# Altium PCB pcb big.PcbDoc (part 5 of 5)
Units mil, origin at the board's own origin, x right, y up, seen from the top; angles counter-clockwise.
Board outline 4068 x 10796 mil, 6 copper layers (TopLayer, MidLayer1, MidLayer2, MidLayer3, MidLayer4, BottomLayer); 521 components, 260 nets, 1284 pads, 1180 vias.
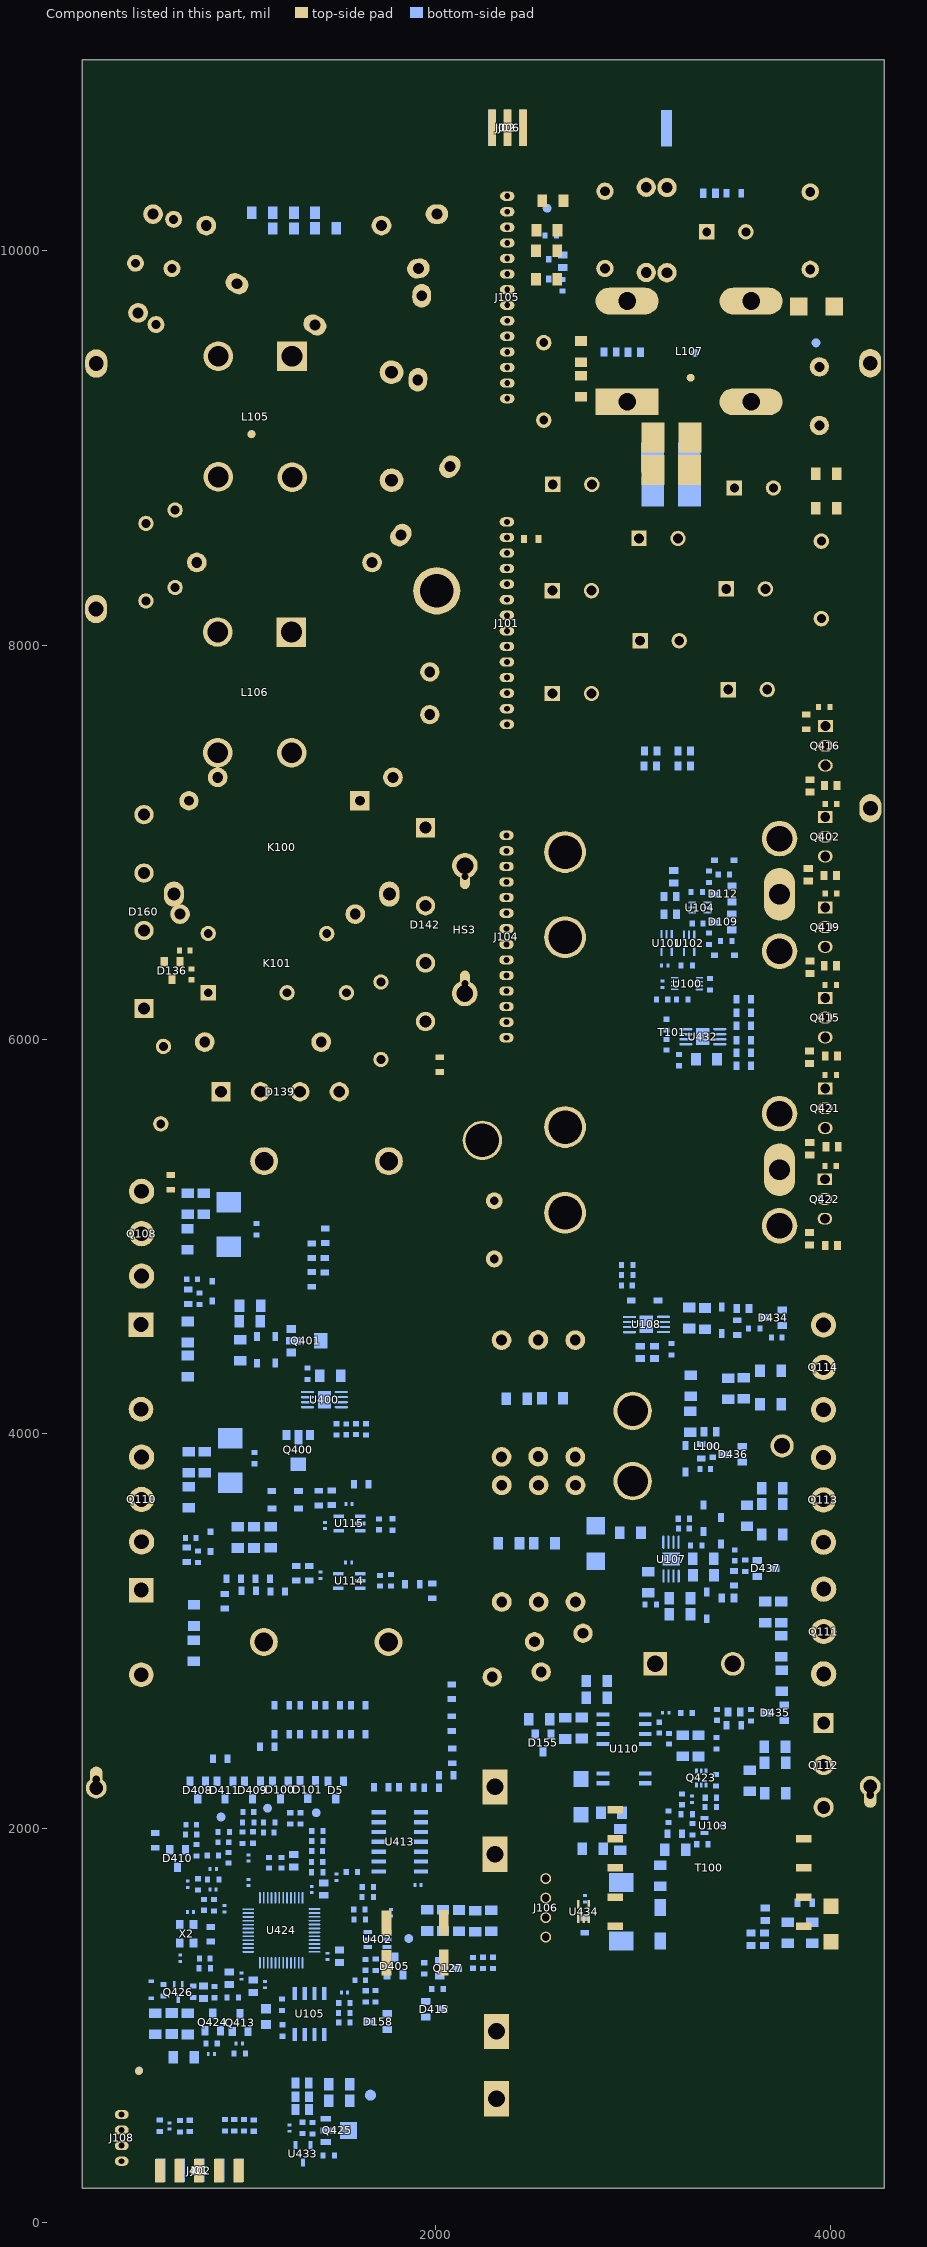
[diagram p9: the components of this part, seen from the top]

## Polygon pours and split planes (outlines as drawn) (continued)
UnNamedNet7 on MidLayer3 "MidLayer3-UnNamedNet7" (hatched 90Degree grid 5 track 6, remove dead copper, pour order 83): 76 vertices, not listed, extent 3923,4756 4170,7833
UnNamedNet37 on MidLayer3 "MidLayer3-UnNamedNet37" (hatched 90Degree grid 5 track 6, remove dead copper, pour order 84): 29 vertices, not listed, extent 3662,6535 4001,7533
UnNamedNet41 on MidLayer3 "MidLayer3-UnNamedNet41" (hatched 90Degree grid 5 track 6, remove dead copper, pour order 85): 30 vertices, not listed, extent 3660,5144 4001,6504
UnNamedNet50 on MidLayer3 "MidLayer3-UnNamedNet50" (hatched 90Degree grid 5 track 6, remove dead copper, pour order 86): 41 vertices, not listed, extent 1992,815 4014,4418
UnNamedNet4 on MidLayer3 "MidLayer3-UnNamedNet4" (hatched 90Degree grid 5 track 6, remove dead copper, pour order 87): 54 vertices, not listed, extent 2422,4772 4114,9332
UnNamedNet13 on MidLayer3 "MidLayer3-UnNamedNet13" (hatched 90Degree grid 5 track 6, remove dead copper, pour order 88): 3500,8899 3500,8876 3754,8876 3835,8957 3835,8974 3870,9009 3870,9306 3862,9314 3329,9314 3320,9305 3320,8883 3327,8876 3500,8876
UnNamedNet94 on MidLayer3 "MidLayer3-UnNamedNet94" (hatched 90Degree grid 5 track 6, remove dead copper, pour order 89): 17 vertices, not listed, extent 369,4311 1233,5447
UnNamedNet99 on MidLayer3 "MidLayer3-UnNamedNet99" (hatched 90Degree grid 5 track 6, remove dead copper, pour order 90): 21 vertices, not listed, extent 370,2808 1195,3763
UnNamedNet90 on MidLayer3 "MidLayer3-UnNamedNet90" (hatched 90Degree grid 5 track 6, remove dead copper, pour order 91): 31 vertices, not listed, extent 2068,3675 2872,6624
UnNamedNet270 on MidLayer3 "MidLayer3-UnNamedNet270" (hatched 90Degree grid 5 track 6, remove dead copper, pour order 92): 30 vertices, not listed, extent 1050,6168 2202,7695
UnNamedNet269 on MidLayer3 "MidLayer3-UnNamedNet269" (hatched 90Degree grid 5 track 6, remove dead copper, pour order 93): 21 vertices, not listed, extent 352,5900 974,7239
UnNamedNet11 on MidLayer3 "MidLayer3-UnNamedNet11" (hatched 90Degree grid 5 track 6, remove dead copper, pour order 94): 64 vertices, not listed, extent 238,245 2428,10901
UnNamedNet69 on MidLayer3 "MidLayer3-UnNamedNet69" (hatched 90Degree grid 5 track 6, remove dead copper, pour order 95): 1037,10448 1037,10423 1166,10423 1180,10437 1180,10881 993,10881 993,10438 1007,10424 1038,10424 1038,10445
UnNamedNet72 on MidLayer3 "MidLayer3-UnNamedNet72" (hatched 90Degree grid 5 track 6, remove dead copper, pour order 96): 21 vertices, not listed, extent 477,10095 886,10881
UnNamedNet277 on MidLayer3 "MidLayer3-UnNamedNet277" (hatched 90Degree grid 5 track 6, remove dead copper, pour order 97): 17 vertices, not listed, extent 1704,8169 2143,8909
UnNamedNet272 on MidLayer3 "MidLayer3-UnNamedNet272" (hatched 90Degree grid 5 track 6, remove dead copper, pour order 98): 21 vertices, not listed, extent 1178,7999 1723,8931
UnNamedNet273 on MidLayer3 "MidLayer3-UnNamedNet273" (hatched 90Degree grid 5 track 6, remove dead copper, pour order 99): 23 vertices, not listed, extent 648,7997 1112,8925
UnNamedNet61 on MidLayer3 "MidLayer3-UnNamedNet61" (hatched 90Degree grid 5 track 6, remove dead copper, pour order 100): 17 vertices, not listed, extent 2460,9613 3207,10044
UnNamedNet34 on MidLayer3 "MidLayer3-UnNamedNet34" (hatched 90Degree grid 5 track 6, remove dead copper, pour order 101): 36 vertices, not listed, extent 2281,10125 3214,10902
UnNamedNet254 on MidLayer3 "MidLayer3-UnNamedNet254" (hatched 90Degree grid 5 track 6, remove dead copper, pour order 102): 42 vertices, not listed, extent 3165,9361 3995,10900
UnNamedNet22 on MidLayer3 "MidLayer3-UnNamedNet22" (hatched 90Degree grid 5 track 6, remove dead copper, pour order 103): 20 vertices, not listed, extent 3403,9670 4070,10900
UnNamedNet11 on MidLayer3 "MidLayer3-UnNamedNet11 1" (hatched 90Degree grid 5 track 6, remove dead copper, pour order 104): 29 vertices, not listed, extent 3901,5859 4251,10344
UnNamedNet11 on MidLayer3 "MidLayer3-UnNamedNet11 2" (hatched 90Degree grid 5 track 6, remove dead copper, pour order 105): 30 vertices, not listed, extent 4113,1368 4265,5715
UnNamedNet17 on MidLayer3 "MidLayer3-UnNamedNet17" (hatched 90Degree grid 5 track 6, remove dead copper, pour order 106): 3832,1369 3832,1341 4050,1341 4050,1358 4019,1358 3857,1520 3595,1520 3579,1504 3579,1364 3600,1343 3832,1343
UnNamedNet8 on MidLayer3 "MidLayer3-UnNamedNet8" (hatched 90Degree grid 5 track 6, remove dead copper, pour order 107): 24 vertices, not listed, extent 3715,2019 4020,2866
UnNamedNet7 on MidLayer4 "MidLayer4-UnNamedNet7" (hatched 90Degree grid 5 track 6, remove dead copper, pour order 108): 21 vertices, not listed, extent 2419,4810 4179,9264
UnNamedNet285 on MidLayer4 "MidLayer4-UnNamedNet285" (hatched 90Degree grid 5 track 6, remove dead copper, pour order 109): 2817,6244 2879,6244 2879,6875 2669,7085 2513,7085 2476,7048 2476,6487 2442,6453 2442,6140 2513,6069 2513,5479 2557,5435 2812,5435 2877,5500 2877,6244
UnNamedNet13 on MidLayer4 "MidLayer4-UnNamedNet13" (hatched 90Degree grid 5 track 6, remove dead copper, pour order 110): 3612,8870 3612,8849 3829,8849 3848,8868 3848,9277 3811,9314 3443,9314 3368,9239 3368,8865 3383,8850 3612,8850
UnNamedNet34 on MidLayer4 "MidLayer4-UnNamedNet34" (hatched 90Degree grid 5 track 6, remove dead copper, pour order 111): 21 vertices, not listed, extent 2248,10151 3205,10895
UnNamedNet22 on MidLayer4 "MidLayer4-UnNamedNet22" (hatched 90Degree grid 5 track 6, remove dead copper, pour order 112): 35 vertices, not listed, extent 3158,9659 4069,10898
UnNamedNet61 on MidLayer4 "MidLayer4-UnNamedNet61" (hatched 90Degree grid 5 track 6, remove dead copper, pour order 113): 21 vertices, not listed, extent 2586,9614 3398,10135
UnNamedNet274 on MidLayer4 "MidLayer4-UnNamedNet274" (hatched 90Degree grid 5 track 6, remove dead copper, pour order 114): 30 vertices, not listed, extent 774,8504 2151,10370
UnNamedNet272 on MidLayer4 "MidLayer4-UnNamedNet272" (hatched 90Degree grid 5 track 6, remove dead copper, pour order 115): 26 vertices, not listed, extent 481,7999 1720,8930
UnNamedNet221 on MidLayer4 "MidLayer4-UnNamedNet221" (hatched 90Degree grid 5 track 6, remove dead copper, pour order 116): 36 vertices, not listed, extent 1186,6254 2218,7543
UnNamedNet147 on MidLayer4 "MidLayer4-UnNamedNet147" (hatched 90Degree grid 5 track 6, remove dead copper, pour order 117): 41 vertices, not listed, extent 2909,3413 3975,4868
UnNamedNet8 on MidLayer4 "MidLayer4-UnNamedNet8" (hatched 90Degree grid 5 track 6, remove dead copper, pour order 118): 153 vertices, not listed, extent 303,198 4023,7243
UnNamedNet69 on MidLayer4 "MidLayer4-UnNamedNet69" (hatched 90Degree grid 5 track 6, remove dead copper, pour order 119): 38 vertices, not listed, extent 423,9469 1768,10878
UnNamedNet11 on MidLayer4 "MidLayer4-UnNamedNet11" (hatched 90Degree grid 5 track 6, remove dead copper, pour order 120): 1422,10418 1422,10392 1529,10392 1540,10403 1531,10412 1531,10881 1511,10901 1318,10901 1309,10892 1309,10401 1319,10391 1422,10391
UnNamedNet72 on MidLayer4 "MidLayer4-UnNamedNet72" (hatched 90Degree grid 5 track 6, remove dead copper, pour order 121): 789,10437 789,10412 856,10412 856,10495 858,10515 861,10522 874,10535 879,10538 889,10543 889,10857 865,10881 655,10881 655,10412 790,10412 790,10437
UnNamedNet11 on MidLayer4 "MidLayer4-UnNamedNet11 1" (hatched 90Degree grid 5 track 6, remove dead copper, pour order 122): 59 vertices, not listed, extent 221,242 389,10328
UnNamedNet11 on MidLayer4 "MidLayer4-UnNamedNet11 2" (hatched 90Degree grid 5 track 6, remove dead copper, pour order 123): 34 vertices, not listed, extent 2494,5858 4251,10347
UnNamedNet11 on MidLayer4 "MidLayer4-UnNamedNet11 3" (hatched 90Degree grid 5 track 6, remove dead copper, pour order 124): 30 vertices, not listed, extent 4112,1354 4269,5715
UnNamedNet8 on BottomLayer "BottomLayer-UnNamedNet8" (hatched 90Degree grid 5 track 6, remove dead copper, pour order 125): 18 vertices, not listed, extent 2561,2541 2897,2773
UnNamedNet11 on BottomLayer "BottomLayer-UnNamedNet11" (hatched 90Degree grid 5 track 6, remove dead copper, pour order 126): 79 vertices, not listed, extent 229,692 696,10329
UnNamedNet11 on BottomLayer "BottomLayer-UnNamedNet11 1" (hatched 90Degree grid 5 track 6, remove dead copper, pour order 127): 129 vertices, not listed, extent 4053,1340 4268,10324
UnNamedNet7 on BottomLayer "BottomLayer-UnNamedNet7" (hatched 90Degree grid 5 track 6, remove dead copper, pour order 128): 43 vertices, not listed, extent 2417,6904 4149,9090
UnNamedNet41 on BottomLayer "BottomLayer-UnNamedNet41" (hatched 90Degree grid 5 track 6, remove dead copper, pour order 129): 3943,6104 3943,6085 3995,6085 3995,6133 3913,6133 3913,6085 3945,6085 3945,6104
UnNamedNet7 on BottomLayer "BottomLayer-UnNamedNet7 1" (hatched 90Degree grid 5 track 6, remove dead copper, pour order 130): 3984,6919 3984,6904 4035,6904 4035,6953 3963,6953 3963,6903 3983,6903 3983,6922
UnNamedNet7 on BottomLayer "BottomLayer-UnNamedNet7 2" (hatched 90Degree grid 5 track 6, remove dead copper, pour order 131): 3995,7379 3995,7362 4036,7362 4036,7413 3967,7413 3967,7362 3994,7362 3994,7381
UnNamedNet37 on BottomLayer "BottomLayer-UnNamedNet37" (hatched 90Degree grid 5 track 6, remove dead copper, pour order 132): 31 vertices, not listed, extent 3661,6544 3996,7514
UnNamedNet50 on BottomLayer "BottomLayer-UnNamedNet50" (hatched 90Degree grid 5 track 6, remove dead copper, pour order 133): 2294,2302 2294,2331 2364,2331 2364,2295 2368,2291 2368,2124 2219,2124 2219,2202 2175,2202 2175,2214 2219,2258 2219,2306 2242,2329 2295,2329 2295,2304
UnNamedNet50 on BottomLayer "BottomLayer-UnNamedNet50 1" (hatched 90Degree grid 5 track 6, remove dead copper, pour order 134): 2272,909 2272,885 2380,885 2380,1002 2377,1005 2377,1081 2367,1091 2232,1091 2219,1078 2219,894 2228,885 2273,885 2273,907
UnNamedNet8 on BottomLayer "BottomLayer-UnNamedNet8 1" (hatched 90Degree grid 5 track 6, remove dead copper, pour order 135): 2332,633 2380,633 2380,718 2255,718 2248,711 2234,711 2234,517 2359,517 2359,545 2380,545 2380,631 2334,631
UnNamedNet8 on BottomLayer "BottomLayer-UnNamedNet8 2" (hatched 90Degree grid 5 track 6, remove dead copper, pour order 136): 1282,669 1303,669 1303,760 1250,760 1242,752 1242,568 1258,552 1303,552 1303,669
UnNamedNet16 on BottomLayer "BottomLayer-UnNamedNet16" (hatched 90Degree grid 5 track 6, remove dead copper, pour order 137): 19 vertices, not listed, extent 1342,500 1466,763
UnNamedNet8 on BottomLayer "BottomLayer-UnNamedNet8 3" (hatched 90Degree grid 5 track 6, remove dead copper, pour order 138): 1462,658 1476,658 1476,764 1418,764 1418,598 1428,588 1477,588 1477,657 1460,657
UnNamedNet126 on BottomLayer "BottomLayer-UnNamedNet126" (hatched 90Degree grid 5 track 6, remove dead copper, pour order 139): 23 vertices, not listed, extent 1432,332 1703,765
UnNamedNet46 on BottomLayer "BottomLayer-UnNamedNet46" (hatched 90Degree grid 5 track 6, remove dead copper, pour order 140): 3822,1610 3822,1602 3847,1602 3847,1638 3825,1638 3807,1656 3768,1656 3768,1640 3806,1602 3822,1602
UnNamedNet18 on BottomLayer "BottomLayer-UnNamedNet18" (hatched 90Degree grid 5 track 6, remove dead copper, pour order 141): 3917,1625 3917,1602 3949,1602 3955,1608 3955,1637 3947,1645 3923,1645 3912,1634 3912,1603 3918,1603 3918,1621
UnNamedNet17 on BottomLayer "BottomLayer-UnNamedNet17" (hatched 90Degree grid 5 track 6, remove dead copper, pour order 142): 3637,1476 3637,1459 3688,1459 3688,1545 3652,1545 3652,1527 3645,1520 3595,1520 3582,1507 3582,1458 3636,1458 3636,1476
UnNamedNet7 on BottomLayer "BottomLayer-UnNamedNet7 3" (hatched 90Degree grid 5 track 6, remove dead copper, pour order 143): 3667,1404 3667,1386 3804,1386 3804,1439 3754,1439 3751,1436 3729,1436 3713,1420 3580,1420 3580,1393 3587,1386 3667,1386
UnNamedNet8 on BottomLayer "BottomLayer-UnNamedNet8 4" (hatched 90Degree grid 5 track 6, remove dead copper, pour order 144): 3168,1808 3168,1794 3206,1794 3210,1798 3210,1827 3183,1854 3183,1887 3139,1887 3139,1860 3115,1836 3111,1836 3111,1793 3168,1793
UnNamedNet50 on BottomLayer "BottomLayer-UnNamedNet50 2" (hatched 90Degree grid 5 track 6, remove dead copper, pour order 145): 2891,1891 2891,1874 2985,1874 3019,1908 3019,1940 3000,1940 3000,1928 2992,1920 2861,1920 2861,1874 2890,1874 2890,1893
UnNamedNet44 on BottomLayer "BottomLayer-UnNamedNet44" (hatched 90Degree grid 5 track 6, remove dead copper, pour order 146): 2858,1702 2858,1684 2986,1684 2986,1770 2791,1770 2783,1762 2783,1711 2810,1684 2858,1684
UnNamedNet21 on BottomLayer "BottomLayer-UnNamedNet21" (hatched 90Degree grid 5 track 6, remove dead copper, pour order 147): 32 vertices, not listed, extent 1924,1385 3002,1769
UnNamedNet8 on BottomLayer "BottomLayer-UnNamedNet8 5" (hatched 90Degree grid 5 track 6, remove dead copper, pour order 148): 2158,1574 2158,1565 2308,1565 2308,1708 2389,1789 2389,1945 2383,1951 2243,1951 2243,1778 2087,1622 1933,1622 1924,1613 1924,1565 2159,1565 2159,1572
UnNamedNet90 on BottomLayer "BottomLayer-UnNamedNet90" (hatched 90Degree grid 5 track 6, remove dead copper, pour order 149): 28 vertices, not listed, extent 2136,2745 2774,3949
UnNamedNet4 on BottomLayer "BottomLayer-UnNamedNet4" (hatched 90Degree grid 5 track 6, remove dead copper, pour order 150): 20 vertices, not listed, extent 3133,4980 3817,5788
UnNamedNet41 on BottomLayer "BottomLayer-UnNamedNet41 1" (hatched 90Degree grid 5 track 6, remove dead copper, pour order 151): 22 vertices, not listed, extent 3660,5154 3993,5740
UnNamedNet23 on BottomLayer "BottomLayer-UnNamedNet23" (hatched 90Degree grid 5 track 6, remove dead copper, pour order 152): 3996,9072 3996,9057 4049,9057 4072,9080 4072,9646 4008,9646 3997,9635 3997,9502 4003,9496 4003,9254 3895,9146 3895,9078 3915,9058 3995,9058 3995,9071
UnNamedNet273 on BottomLayer "BottomLayer-UnNamedNet273" (hatched 90Degree grid 5 track 6, remove dead copper, pour order 153): 28 vertices, not listed, extent 648,7997 1111,8927
UnNamedNet272 on BottomLayer "BottomLayer-UnNamedNet272" (hatched 90Degree grid 5 track 6, remove dead copper, pour order 154): 28 vertices, not listed, extent 1200,8001 1728,8932
UnNamedNet275 on BottomLayer "BottomLayer-UnNamedNet275" (hatched 90Degree grid 5 track 6, remove dead copper, pour order 155): 21 vertices, not listed, extent 1729,8839 2130,9438
UnNamedNet274 on BottomLayer "BottomLayer-UnNamedNet274" (hatched 90Degree grid 5 track 6, remove dead copper, pour order 156): 18 vertices, not listed, extent 751,9399 1067,9889
UnNamedNet276 on BottomLayer "BottomLayer-UnNamedNet276" (hatched 90Degree grid 5 track 6, remove dead copper, pour order 157): 18 vertices, not listed, extent 1207,9400 1965,9951
UnNamedNet69 on BottomLayer "BottomLayer-UnNamedNet69" (hatched 90Degree grid 5 track 6, remove dead copper, pour order 158): 1047,10435 1047,10423 1161,10423 1167,10429 1167,10859 1049,10859 1049,10826 1002,10779 1002,10433 1012,10423 1047,10423
UnNamedNet72 on BottomLayer "BottomLayer-UnNamedNet72" (hatched 90Degree grid 5 track 6, remove dead copper, pour order 159): 32 vertices, not listed, extent 514,10084 1067,10860
UnNamedNet34 on BottomLayer "BottomLayer-UnNamedNet34" (hatched 90Degree grid 5 track 6, remove dead copper, pour order 160): 2830,10169 2830,10131 3097,10131 3213,10247 3213,10340 3190,10363 3093,10363 cw(c3093,10404) 3052,10404 3052,10906 2625,10906 2625,10207 2688,10144 2720,10144 2732,10132 2830,10132
UnNamedNet61 on BottomLayer "BottomLayer-UnNamedNet61" (hatched 90Degree grid 5 track 6, remove dead copper, pour order 161): 23 vertices, not listed, extent 2750,9471 3411,10133
UnNamedNet22 on BottomLayer "BottomLayer-UnNamedNet22" (hatched 90Degree grid 5 track 6, remove dead copper, pour order 162): 42 vertices, not listed, extent 3025,9472 4138,10744
UnNamedNet4 on BottomLayer "BottomLayer-UnNamedNet4 1" (hatched 90Degree grid 5 track 6, remove dead copper, pour order 163): 3010,9215 3010,9170 3125,9170 3138,9183 3138,9343 3118,9363 2827,9363 2817,9353 2817,9169 3012,9169 3012,9216
UnNamedNet13 on BottomLayer "BottomLayer-UnNamedNet13" (hatched 90Degree grid 5 track 6, remove dead copper, pour order 164): 3641,8942 3641,8880 3737,8880 3785,8928 3785,9282 3765,9302 3291,9302 3234,9245 3234,8709 3401,8709 3414,8722 3414,8845 3449,8880 3641,8880
UnNamedNet221 on BottomLayer "BottomLayer-UnNamedNet221" (hatched 90Degree grid 5 track 6, remove dead copper, pour order 165): 30 vertices, not listed, extent 1201,6272 2006,7549
UnNamedNet269 on BottomLayer "BottomLayer-UnNamedNet269" (hatched 90Degree grid 5 track 6, remove dead copper, pour order 166): 18 vertices, not listed, extent 471,6309 1502,6906
UnNamedNet265 on BottomLayer "BottomLayer-UnNamedNet265" (hatched 90Degree grid 5 track 6, remove dead copper, pour order 167): 518,6132 518,6107 577,6107 577,6207 543,6241 477,6241 471,6235 471,6109 520,6109 520,6135
UnNamedNet266 on BottomLayer "BottomLayer-UnNamedNet266" (hatched 90Degree grid 5 track 6, remove dead copper, pour order 168): 30 vertices, not listed, extent 1700,5142 2350,5938
UnNamedNet265 on BottomLayer "BottomLayer-UnNamedNet265 1" (hatched 90Degree grid 5 track 6, remove dead copper, pour order 169): 26 vertices, not listed, extent 780,5308 1843,6089
UnNamedNet188 on BottomLayer "BottomLayer-UnNamedNet188" (hatched 90Degree grid 5 track 6, remove dead copper, pour order 170): 17 vertices, not listed, extent 453,5127 1023,5330
UnNamedNet50 on BottomLayer "BottomLayer-UnNamedNet50 3" (hatched 90Degree grid 5 track 6, remove dead copper, pour order 171): 682,4282 682,4268 749,4268 749,4308 538,4308 456,4226 456,4104 560,4104 560,4127 567,4134 567,4195 640,4268 682,4268
UnNamedNet8 on BottomLayer "BottomLayer-UnNamedNet8 6" (hatched 90Degree grid 5 track 6, remove dead copper, pour order 172): 27 vertices, not listed, extent 1248,3790 1472,4213
UnNamedNet197 on BottomLayer "BottomLayer-UnNamedNet197" (hatched 90Degree grid 5 track 6, remove dead copper, pour order 173): 20 vertices, not listed, extent 464,3823 1022,4118

## Keep-outs
KeepOutLayer:
  circle w5: c3110,2997 r18.97
  circle w5: c2114,9802 r62.63
  circle w5: c3927,7940 r70
  circle w5: c3721,2091 r33.12
  circle w5: c3051,2091 r33.6
  lines w5: 2117,176.05 ccw(c2054,179) 1991,176 655,176 312,176 cw(c312,280) 208,280 208,1469 273,1469 ccw(c273,1528) 332,1528 ccw(c272,1528) 272,1588 208,1588 208,5728 279,5728 ccw(c279,5781) 332,5781 332,5794 ccw(c281,5794) 281,5845 208,5845 208,9938 cw(c212,9938) 212,9942 283,9942 ccw(c283,9992) 333,9992 333,10007 ccw(c281,10007) 281,10059 211,10059 ccw(c208,10059) 208,10062 208,10261 cw(c319,10261) 319,10372 609,10372 ccw(c609,10395) 632,10395 632,10926 670,10964 1519,10964 1566,10917 1566,10888 1566,10429 ccw(c1582,10429) 1582,10413 1591,10413 ccw(c1591,10432) 1610,10432 1610,10449 1610,10920 1657,10967 3806,10967 3848,10925 3848,10910 3848,10392 ccw(c3865,10392) 3865,10375 4153,10375 cw(c4153,10257) 4271,10257 4271,10064 4207,10064 ccw(c4207,10001) 4144,10001 ccw(c4201,10001) 4201,9944 4269,9944 ccw(c4271,9944) 4271,9942 4271,5850 4202,5850 ccw(c4202,5793) 4145,5793 ccw(c4207,5793) 4207,5731 4270,5731 ccw(c4271,5731) 4271,5730 4271,1593 4201,1593 ccw(c4201,1537) 4145,1537 ccw(c4207,1537) 4207,1475 4269,1475 ccw(c4271,1475) 4271,1473 4271,1415 cw(c4154,1415) 4154,1298 2408,1298 ccw(c2408,1281) 2391,1281 2391,294 cw(c2273,294) 2273,176 2118,176
  lines w45: 909,10405 909,10497 ; 2190,10022 2190,10281 ; 3100,10411 3100,10504 ; 3765,1866 3980,1866 ; 3766,1721 3983,1721

## Other copper
TopLayer:
  rectangle net UnNamedNet11: 4186,2120 4237,2225
  rectangle net UnNamedNet11: 4195,7122 4247,7232
  rectangle net UnNamedNet11: 4217,9388 4248,9485
  rectangle net UnNamedNet11: 4192,9454 4238,9492
  rectangle net UnNamedNet11: 4172,9449 4220,9484
  rectangle net UnNamedNet11: 4162,9357 4237,9414
  rectangle net UnNamedNet269: 622,6669 715,6821
  rectangle net UnNamedNet11: 235,9370 290,9493
  rectangle net UnNamedNet11: 232,8134 303,8241
  rectangle net UnNamedNet275: 2026,8867 2110,8962
  rectangle net UnNamedNet275: 1869,9279 1950,9404
  rectangle net UnNamedNet274: 1023,9807 1042,9838
  rectangle net UnNamedNet274: 998,9790 1031,9859
  rectangle net UnNamedNet274: 957,9779 1014,9872
  rectangle net UnNamedNet274: 967,9824 997,9874
  rectangle net UnNamedNet274: 946,9813 993,9865
  rectangle net UnNamedNet276: 1317,9565 1467,9703
  rectangle net UnNamedNet276: 1882,9718 1960,9830
  rectangle net UnNamedNet276: 1864,9863 1954,9946
  rectangle net UnNamedNet22: 3455,9664 3766,9803
  rectangle net UnNamedNet61: 2825,9695 3121,9796
  rectangle net UnNamedNet13: 3454,9165 3509,9251
  rectangle net UnNamedNet13: 3462,9181 3490,9273
  rectangle net UnNamedNet13: 3481,9160 3763,9285
  rectangle net UnNamedNet4: 2821,9182 3115,9286
  rectangle net UnNamedNet4: 3717,6823 3767,6857
  rectangle net UnNamedNet4: 3676,6619 3798,6844
  rectangle net UnNamedNet4: 3680,5232 3799,5444
  rectangle net UnNamedNet8: 2247,1777 2357,1949
  rectangle net UnNamedNet22: 3146,10673 3362,10748
  rectangle net UnNamedNet36: 2707,9355 2765,9445
  rectangle net UnNamedNet11: 1337,10390 1505,10904
  rectangle net UnNamedNet254: 3146,10769 3287,10910
  rectangle net UnNamedNet99: 495,3175 525,3219
  rectangle net UnNamedNet99: 447,3116 565,3189
  rectangle net UnNamedNet284: 2570,5094 2732,5185
  rectangle net UnNamedNet284: 2557,5030 2737,5132
  rectangle net UnNamedNet284: 2609,5034 2715,5197
MidLayer1:
  rectangle net UnNamedNet11: 4180,2117 4229,2228
  rectangle net UnNamedNet50: 2233,893 2353,1076
  rectangle net UnNamedNet11: 247,2187 307,2301
  rectangle net UnNamedNet50: 2204,2126 2387,2333
  rectangle net UnNamedNet11: 4167,7116 4248,7234
  rectangle net UnNamedNet274: 1774,8521 1871,8616
  rectangle net UnNamedNet11: 246,9372 309,9401
  rectangle net UnNamedNet11: 229,9386 320,9503
  rectangle net UnNamedNet274: 963,9841 1008,9874
  rectangle net UnNamedNet274: 949,9777 1064,9866
  rectangle net UnNamedNet274: 1944,10114 2059,10233
  rectangle net UnNamedNet11: 4159,9371 4244,9503
  rectangle net UnNamedNet4: 2797,9141 3207,9311
  rectangle net UnNamedNet22: 3424,9671 3796,9830
  rectangle net UnNamedNet61: 2856.92,9773 3139,9808.92
  rectangle net UnNamedNet61: 2830,9696 3129,9791
  rectangle net UnNamedNet7: 3661,1455 3688,1568
  rectangle net UnNamedNet219: 1689,6691 1790,6864
  rectangle net UnNamedNet219: 1664,6731 1709,6799
  rectangle net UnNamedNet16: 1314,711 1400,802
  rectangle net UnNamedNet50: 543,2690 588,2837
  rectangle net UnNamedNet50: 419,2702 429,2869
  rectangle net UnNamedNet16: 352,293 474,324
  rectangle net UnNamedNet17: 4021,1346 4068,1366
  rectangle net UnNamedNet34: 2833,10242 2875,10363
  rectangle net UnNamedNet34: 2784,10287 2948,10329
  rectangle net UnNamedNet22: 3890,10227 3913,10300
  rectangle net UnNamedNet22: 3819,10297 3978,10316
  rectangle net UnNamedNet23: 4002,9559 4082,9647
  rectangle net UnNamedNet8: 894,4780 1002,4881
  rectangle net UnNamedNet8: 900,3618 1037,3750
  rectangle net UnNamedNet13: 3415,9129 3442,9251
  rectangle net UnNamedNet13: 3372,8887 3427,9248
  rectangle net UnNamedNet13: 3430,9132 3760,9305
  rectangle net UnNamedNet13: 3758,9163 3792,9277
  rectangle net UnNamedNet7: 2949,8805 3033,9093
MidLayer2:
  rectangle net UnNamedNet11: 4155,9355 4245,9504
  rectangle net UnNamedNet22: 3398,9672 3809,9833
  rectangle net UnNamedNet61: 2854,9764 3133,9800
  rectangle net UnNamedNet61: 2824,9694 3135,9789
  rectangle net UnNamedNet11: 235,9352 380,9499
  rectangle net UnNamedNet11: 257,8067 294,8284
  rectangle net UnNamedNet11: 266,8163 369,8200
  rectangle net UnNamedNet11: 4183,7111 4246,7232
  rectangle net UnNamedNet8: 2203,2661 2392,2841
  rectangle net UnNamedNet8: 2235,4878 2372,4898
  rectangle net UnNamedNet8: 2289,4818 2306,4951
  rectangle net UnNamedNet8: 2300,7017 2377,7045
  rectangle net UnNamedNet8: 2296,6308 2375,6335
  rectangle net UnNamedNet8: 3431,2835 3465,2901
  rectangle net UnNamedNet8: 3432,2791 3514,2870
  rectangle net UnNamedNet8: 3390,2802 3438,2902
  rectangle net UnNamedNet8: 3403,2709 3526,2835
  rectangle net UnNamedNet8: 3943,2028 3982,2174
  rectangle net UnNamedNet8: 3890,2087 3993,2124
  rectangle net UnNamedNet11: 247,2188 300,2296
  rectangle net UnNamedNet8: 2256,1786 2338,1930
  rectangle net UnNamedNet8: 2328,1914 2400,1986
  rectangle net UnNamedNet8: 2200,1917 2273,1999
  rectangle net UnNamedNet8: 2220,1741 2404,1824
  rectangle net UnNamedNet8: 2346,577 2356,733
  rectangle net UnNamedNet8: 2267,545 2339,681
  rectangle net UnNamedNet8: 2216,508 2355,584
  rectangle net UnNamedNet8: 2201,667 2278,751
  rectangle net UnNamedNet37: 3903,6971 3923,6992
  rectangle net UnNamedNet34: 2835,10226 2872,10366
  rectangle net UnNamedNet34: 2785,10285 2928,10324
  rectangle net UnNamedNet219: 871,7309 916,7454
  rectangle net UnNamedNet7: 3635,8684 3805,8894
  rectangle net UnNamedNet7: 3563,8161 3758,8376
  rectangle net UnNamedNet7: 3605,7671 3748,7869
  rectangle net UnNamedNet7: 3156,8423 3300,8636
  rectangle net UnNamedNet7: 3160,7919 3305,8124
  rectangle net UnNamedNet7: 2705,8719 2865,8904
  rectangle net UnNamedNet7: 2710,8191 2906,8368
  rectangle net UnNamedNet7: 2715,7651 2857,7849
  rectangle net UnNamedNet23: 4001,9562 4064,9635
  rectangle net UnNamedNet13: 3370,8892 3417,9176
  rectangle net UnNamedNet13: 3377,9158 3401,9257
  rectangle net UnNamedNet13: 3390,9184 3420,9267
  rectangle net UnNamedNet13: 3401,9134 3750,9275
  rectangle net UnNamedNet4: 2843,9228 3100,9316
MidLayer3:
  rectangle net UnNamedNet11: 4155,9365 4242,9498
  rectangle net UnNamedNet13: 3805,9051 3872,9230
  rectangle net UnNamedNet22: 3455,9695 3757,9812
  rectangle net UnNamedNet13: 3432,9153 3798,9295
  rectangle net UnNamedNet61: 2806,9691 3134,9810
  rectangle net UnNamedNet4: 2795,9162 3170,9292
  rectangle net UnNamedNet11: 4185,7110 4242,7230
  rectangle net UnNamedNet7: 3975,7370 4054,7408
  rectangle net UnNamedNet7: 3972,6910 4048,6946
  rectangle net UnNamedNet7: 3966,5987 4062,6024
  rectangle net UnNamedNet7: 3953,7329 3996,7387
  rectangle net UnNamedNet7: 3954,6874 3992,6939
  rectangle net UnNamedNet7: 3971,6446 4039,6486
  rectangle net UnNamedNet4: 3683,6618 3799,6847
  rectangle net UnNamedNet7: 3957,6420 3994,6471
  rectangle net UnNamedNet7: 3959,5954 3992,6013
  rectangle net UnNamedNet11: 4189,2114 4230,2223
  rectangle net UnNamedNet7: 3967,5528 4035,5567
  rectangle net UnNamedNet7: 3958,5489 3996,5560
  rectangle net UnNamedNet7: 3964,5069 4043,5105
  rectangle net UnNamedNet7: 3956,5038 3993,5091
  rectangle net UnNamedNet4: 3761,5359 3799,5439
  rectangle net UnNamedNet4: 3660,5213 3800,5386
  rectangle net UnNamedNet4: 3672,5349 3774,5453
  rectangle net UnNamedNet11: 235,9353 351,9495
  rectangle net UnNamedNet269: 620,6675 713,6813
  rectangle net UnNamedNet50: 2163,2262 2427,2370
  rectangle net UnNamedNet50: 2326,2056 2394,2142
  rectangle net UnNamedNet50: 2380,2052 2435,2303
  rectangle net UnNamedNet50: 2168,2122 2413,2164
  rectangle net UnNamedNet50: 2243,2050 2418,2090
  rectangle net UnNamedNet50: 2151,2061 2218,2325
  rectangle net UnNamedNet50: 2203,2053 2267,2141
  rectangle net UnNamedNet50: 2333,818 2353,955
  rectangle net UnNamedNet50: 2167,1011 2349,1155
  rectangle net UnNamedNet50: 2248,822 2346,868
  rectangle net UnNamedNet50: 2148,834 2226,1083
  rectangle net UnNamedNet50: 2217,831 2273,936
  rectangle net UnNamedNet11: 243,2178 299,2304
  rectangle net UnNamedNet269: 511,6775 541,6915
  rectangle net UnNamedNet269: 448,6828 600,6865
  rectangle net UnNamedNet34: 2837,10233 2879,10370
  rectangle net UnNamedNet34: 2776,10283 2943,10324
  rectangle net UnNamedNet22: 3890,10220 3912,10303
  rectangle net UnNamedNet22: 3830,10285 3969,10308
  rectangle net UnNamedNet7: 2955,8803 3038,9090
  rectangle net UnNamedNet23: 4002,9554 4075,9636
  rectangle net UnNamedNet8: 888,4768 1021,4896
  rectangle net UnNamedNet8: 907,3621 1042,3755
MidLayer4:
  rectangle net UnNamedNet274: 1785,8516 1865,8616
  rectangle net UnNamedNet274: 1930,10115 2070,10270
  rectangle net UnNamedNet22: 3450,9678 3882,9821
  rectangle net UnNamedNet61: 2815,9671 3130,9811
  rectangle net UnNamedNet13: 3445,9131 3745,9292
  rectangle net UnNamedNet7: 3939,8061 3970,8190
  rectangle net UnNamedNet7: 3895,8116 4021,8146
  rectangle net UnNamedNet7: 3957,7327 3995,7384
  rectangle net UnNamedNet7: 3918,7365 4044,7406
  rectangle net UnNamedNet7: 3956,6871 3995,6928
  rectangle net UnNamedNet7: 3910,6907 4029,6945
  rectangle net UnNamedNet7: 3955,6406 3997,6458
  rectangle net UnNamedNet7: 3909,6446 4035,6485
  rectangle net UnNamedNet7: 3954,5951 3994,6013
  rectangle net UnNamedNet7: 3920,5992 4038,6024
  rectangle net UnNamedNet7: 3955,5484 3996,5545
  rectangle net UnNamedNet7: 3920,5526 4040,5566
  rectangle net UnNamedNet7: 3956,5031 3993,5092
  rectangle net UnNamedNet7: 3916,5071 4048,5108
  rectangle net UnNamedNet11: 4145,9374 4245,9500
  rectangle net UnNamedNet11: 4166,7117 4245,7228
  rectangle net UnNamedNet13: 3631,8847 3763,8892
  rectangle net UnNamedNet11: 4176,2120 4235,2223
  rectangle net UnNamedNet8: 3327,3538 3378,3618
  rectangle net UnNamedNet8: 2386,1789 2423,1951
  rectangle net UnNamedNet8: 2173,1710 2458,1827
  rectangle net UnNamedNet8: 2153,1926 2418,2049
  rectangle net UnNamedNet8: 2156,1802 2215,1984
  rectangle net UnNamedNet11: 230,9384.67 316.67,9502
  rectangle net UnNamedNet11: 230,9372.17 304.17,9413
  rectangle net UnNamedNet11: 275,8163 366,8205
  rectangle net UnNamedNet11: 250,8068 288,8289
  rectangle net UnNamedNet11: 237,2177 298,2300
  rectangle net UnNamedNet34: 2836,10218 2875,10366
  rectangle net UnNamedNet34: 2783,10285 2950,10326
  rectangle net UnNamedNet8: 3947,2843 3997,2862
  rectangle net UnNamedNet8: 3890,2753 3971,2798
  rectangle net UnNamedNet8: 3948,2691 3988,2858
  rectangle net UnNamedNet8: 3875,2083 3970,2118
  rectangle net UnNamedNet8: 3948,2022 3988,2177
  rectangle net UnNamedNet23: 4000,9553 4076,9638
  rectangle net UnNamedNet219: 860,7317 915,7444
  rectangle: 2043,10514 2080,10816
  rectangle: 1965,10514 2000,10818
  rectangle: 1885,10514 1922,10815
  rectangle: 1805,10514 1843,10819
  rectangle: 2043,10861 2080,10898
  rectangle: 1965,10860 2002,10899
  rectangle: 1884,10861 1920,10898
  rectangle: 1806,10861 1843,10898
BottomLayer:
  rectangle net UnNamedNet11: 237,8124 312,8240
  rectangle net UnNamedNet11: 4159.92,9357 4197,9476.92
  rectangle net UnNamedNet11: 4176.17,9359 4247,9493.17
  rectangle net UnNamedNet22: 3457,9682 3767,9796
  rectangle net UnNamedNet61: 2827,9694 3120,9791
  rectangle net UnNamedNet11: 230,9372 309,9486
  rectangle net UnNamedNet276: 1892,9697 1962,9843
  rectangle net UnNamedNet276: 1890,9899 1952.18,9944
  rectangle net UnNamedNet276: 1847,9859 1950,9933
  rectangle net UnNamedNet276: 1320,9581 1447,9709
  rectangle net UnNamedNet274: 997,9774 1033,9866.97
  rectangle net UnNamedNet274: 942,9776 1007,9874
  rectangle net UnNamedNet275: 1859,9239 1960,9399
  rectangle net UnNamedNet275: 2032,8869 2113.34,8945
  rectangle net UnNamedNet269: 602,6673 742,6822
  rectangle net UnNamedNet29: 3918,6182 3977,6202
  rectangle net UnNamedNet11: 4179,2116 4234,2223
  rectangle net UnNamedNet8: 2252,1789 2357,1942
  rectangle net UnNamedNet13: 3446,9136 3759,9296
  rectangle net UnNamedNet13: 3230,8767 3309,8942
  rectangle net UnNamedNet7: 3120,8847 3192,8861
  rectangle net UnNamedNet7: 3083,8777 3160,8948
  rectangle net UnNamedNet4: 2824,9186 3129,9312
  rectangle net UnNamedNet7: 3958,5981 4040,6037
  rectangle net UnNamedNet7: 3958,5521 4039,5578
  rectangle net UnNamedNet7: 3649,1582 3693,1638
  rectangle net UnNamedNet126: 3109,1570 3167,1715
  rectangle net UnNamedNet90: 2257,3437 2328,3454
  rectangle net UnNamedNet50: 2241,2132 2355,2294
  rectangle net UnNamedNet50: 2242,893 2362,1071
  rectangle net UnNamedNet8: 2256,551 2361,707
  rectangle net UnNamedNet11: 243,2178 305,2299
  rectangle net UnNamedNet7: 3947,8073 3965,8202
  rectangle net UnNamedNet7: 3893,8124 4034,8141
  rectangle net UnNamedNet49: 2735,2220 3091,2284
  rectangle net UnNamedNet11: 1338,10390 1507,10906
  rectangle net UnNamedNet70: 1374,10100 1399,10192
  rectangle net UnNamedNet71: 1269,10095 1291,10194
  rectangle net UnNamedNet73: 1162,10102 1184,10197
  rectangle net UnNamedNet254: 3228,10462 3281,10761
  rectangle net UnNamedNet254: 3145,10738 3283,10907
  rectangle net UnNamedNet50: 509,2759 539,2806
  rectangle net UnNamedNet50: 569,2790 602,2827
  rectangle net UnNamedNet50: 521,2736 584,2828
  rectangle net UnNamedNet50: 529,2817 795,2845
  rectangle net UnNamedNet8: 904,3622 1051,3795
  rectangle net UnNamedNet8: 1383,4438 1412,4481
  rectangle net UnNamedNet8: 1389,4457 1426,4544
  rectangle net UnNamedNet8: 1376,4420 1396,4556
  rectangle net UnNamedNet8: 1327,4409 1381,4568
  rectangle net UnNamedNet96: 713,4384 768,4475
  rectangle net UnNamedNet8: 715,4548 805,4606
  rectangle net UnNamedNet8: 906,4957 925,4984
  rectangle net UnNamedNet8: 901,4783 925,4975
  rectangle net UnNamedNet8: 1013,4941 1028,4978
  rectangle net UnNamedNet8: 1019,4932 1040,4964
  rectangle net UnNamedNet8: 1007,4932 1023,4974
  rectangle net UnNamedNet8: 1010,4794 1038,4950
  rectangle net UnNamedNet8: 914,4789 1015,4990
  rectangle net UnNamedNet41: 3672,6353 3803,6479
  rectangle net UnNamedNet147: 3984,2943 4039,3043
  rectangle: 2334,5907 2399,5948
  rectangle net UnNamedNet17: 2331,9208 2397,9252
  rectangle: 2331,7499 2397,7539
  rectangle net UnNamedNet55: 3221,6630 3231,6637
  rectangle net UnNamedNet55: 3202,6625 3225,6639
  rectangle net UnNamedNet55: 3194,6623 3205,6666
  rectangle net UnNamedNet55: 3199,6635 3233,6741
  rectangle net UnNamedNet32: 4017,6647 4033,6683
  rectangle net UnNamedNet32: 3974,6646 4020,6687
  rectangle net UnNamedNet100: 726,3714 765,3807
  rectangle net UnNamedNet100: 736,3784 832,3818
  rectangle net UnNamedNet99: 445,3112 573,3232
  rectangle net UnNamedNet105: 742,2938 802,3035
  rectangle net UnNamedNet8: 744,3111 769,3186
  rectangle net UnNamedNet8: 750,3111 803,3187
  rectangle net UnNamedNet21: 3245,1793 3289,1899
  rectangle net UnNamedNet99: 1074,2949 1131,2958
  rectangle net UnNamedNet99: 1103,2949 1135,3004
  rectangle net UnNamedNet99: 1059,2952 1113,3022

## Silkscreen, mask and mechanical layers (free items; w line width, h text height)
TopOverlay:
  drawing of 482 lines, arcs and shapes, not listed
  text "N" at 1252,10505 h25 r90
  text "L" at 797,10428 h25 r90
  text "1" at 3520,10385 h25 r90
  text "J100" at 2089,10350 h30 r180
  text "same" at 1504,10317 h25 r180
  text "fuse" at 898,10316 h25 r180
  text "of" at 975,10316 h25 r180
  text "and" at 1252,10316 h25 r180
  text "radtina" at 1154,10315 h23 r180
  text "type" at 1372,10315 h25 r180
  text "with" at 856,10273 h26 r180
  text "of" at 1382,10273 h25 r180
  text "risk" at 1503,10272 h25 r180
  text "oniy" at 982,10271 h26 r180
  text "fire,replace" at 1305,10271 h26 r180
  text "HS1" at 458,10252 h22 r90
  text "For" at 1502,10227 h25 r180
  text "CAUTION" at 1702,10227 h25 r180
  text "against" at 879,10224 h25 r180
  text "continued" at 1397,10223 h25 r180
  text "protection" at 1150,10222 h25 r180
  text "ICT100" at 2148,9902 h25 r90
  text "+" at 2447,8128 h25
  text "ICT102" at 4044,7870 h26 r90
  text "+" at 2445,7620 h25
  text "10" at 3827,7112 h25 r90
  text "EN11CTLAF" at 2408,5540 h26 r90
  text "AREA" at 2442,5365 h22 r90
  text "THIS" at 2441,5261 h22 r90
  text "TOUCH" at 2440,5130 h22 r90
  text "4" at 2523,5106 h26 r90
  text "5" at 3879,5065 h25 r90
  text "DANGER:DON'T" at 2440,4871 h22 r90
  text "VER.A" at 697,4200 h65 r90
  text "EN11PWRBI" at 697,3562 h65 r90
  text "EN11PWRBI_4" at 2395,2411 h26 r90
  text "EN11PWRBI_3" at 2387,1321 h26 r90
  text "BOARD" at 496,542 h26 r90
  text "2" at 342,520 h26 r90
  text "LIGHT" at 495,437 h26 r90
  text "ICT101" at 2113,299 h22 r180
  text "EN11PWRBI" at 345,272 h26 r90
BottomOverlay:
  drawing of 4736 lines, arcs and shapes, not listed
  text "20" at 749,10378 h25
  text "2" at 3558,10374 h25
  text "MW2104F35112LH" at 3831,9330 h28
  text "M104" at 2434,5532 h23 r90
TopSolder:
  rectangle: 3072,9864 3161,9924
  rectangle: 3077,10294 3165,10354
  rectangle: 3503,9562 3752,9617
  rectangle: 3281,9577 3357,9820
  rectangle: 624,10574 3907,10995
  rectangle: 3346,5075 3392,5160
  rectangle: 3408,5017 3465,5066
  rectangle: 3379,5049 3543,5172
  rectangle: 3449,4988 3564,5081
  rectangle: 3295,5157 3544,5216
  rectangle: 3214,5205 3528,5254
  rectangle: 3539,5237 3564,5296
  rectangle: 3181,5243 3555,5277
  rectangle: 3138,5274 3565,5311
  rectangle: 3140,5340 3565,5401
  rectangle: 3137,5433 3565,5495
  rectangle: 3137,5518 3565,5578
  rectangle: 3141,5599 3567,5661
  rectangle: 3142,5687 3569,5746
  rectangle: 3138,5770 3568,5828
  rectangle: 3140,5849 3566,5907
  rectangle: 3358,5945 3572,6004
  rectangle: 3359,6040 3573,6099
  rectangle: 3356,6131 3571,6193
  rectangle: 3356,6221 3570,6280
  rectangle: 3355,6308 3571,6369
  rectangle: 3355,6398 3567,6460
  rectangle: 3355,6487 3570,6548
  rectangle: 3312,6576 3568,6636
  rectangle: 3315,6657 3573,6717
  rectangle: 3314,6741 3570,6800
  rectangle: 3314,6825 3569,6885
  rectangle: 3100,6917 3571,6975
  rectangle: 3100,7010 3572,7070
  rectangle: 3098,7101 3571,7159
  rectangle: 3102,7199 3572,7256
  rectangle: 2958,7290 3574,7346
  rectangle: 2770,7380 3573,7438
  rectangle: 2912,7467 3322,7514
  rectangle: 2949,7561 3307,7655
  lines w40: 499,9660 544,9615 563,9615 549,9601 549,9582 546,9585 539,9585 480,9644 480,9671 496,9687 512,9687 573,9626 592,9626 ; 3338,5167 3304,5167 3381,5090 3405,5090 ; 3423,5168 3332,5168 3315,5185 3247,5185 ; 3247,5185 3424,5008 3529,5008 3544,5023 3544,5263 3520,5287 3162,5287 3157,5292 3157,5275 3247,5185
BottomSolder:
  drawing of 531 lines, arcs and shapes, not listed

## Text inside footprints (layer, text, board x,y; h text height)
J01: BottomOverlay "6" at 594,372 h28 r180; BottomOverlay "10" at 990,367 h28 r180
J106: TopOverlay "4" at 2674,1443 h28 r90; TopOverlay "1" at 2674,1741 h28 r90
J402: TopOverlay "5" at 603,367 h28 r180; TopOverlay "1" at 1003,368 h28 r180
K101: TopOverlay "1" at 785,6241 h28 r90; TopOverlay "5" at 768,6530 h28; TopOverlay "4" at 1441,6600 h28; TopOverlay "2" at 1245,6136 h28; TopOverlay "3" at 1554,6138 h28
Q108: TopOverlay "1" at 594,4722 h28 r270
Q110: TopOverlay "1" at 594,3374 h28 r270
Q111: TopOverlay "1" at 3880,3290 h28 r90
Q112: TopOverlay "1" at 3887,2632 h28 r90
Q113: TopOverlay "1" at 3879,3958 h28 r90
Q114: TopOverlay "1" at 3879,4630 h28 r90
Q400: BottomOverlay "1" at 1215,3984 h28; BottomOverlay "2" at 1287,3919 h28 r270; BottomOverlay "3" at 1407,3989 h28; BottomOverlay "4" at 1308,3765 h28
Q401: BottomOverlay "4" at 1495,4478 h28 r90; BottomOverlay "3" at 1271,4577 h28 r90; BottomOverlay "2" at 1341,4457 h28; BottomOverlay "1" at 1276,4385 h28 r90
T101: TopOverlay "1" at 2449,6966 h28 r180
U402: BottomOverlay "1" at 1610,1403 h28 r180